# Altium PCB CCjammerRev0.PcbDoc
Units mil, origin at the board's own origin, x right, y up, seen from the top; angles counter-clockwise.
Board outline 3150 x 2000 mil, 2 copper layers (Top Layer, Bottom Layer); 11 components, 6 nets, 28 pads, 2 vias.
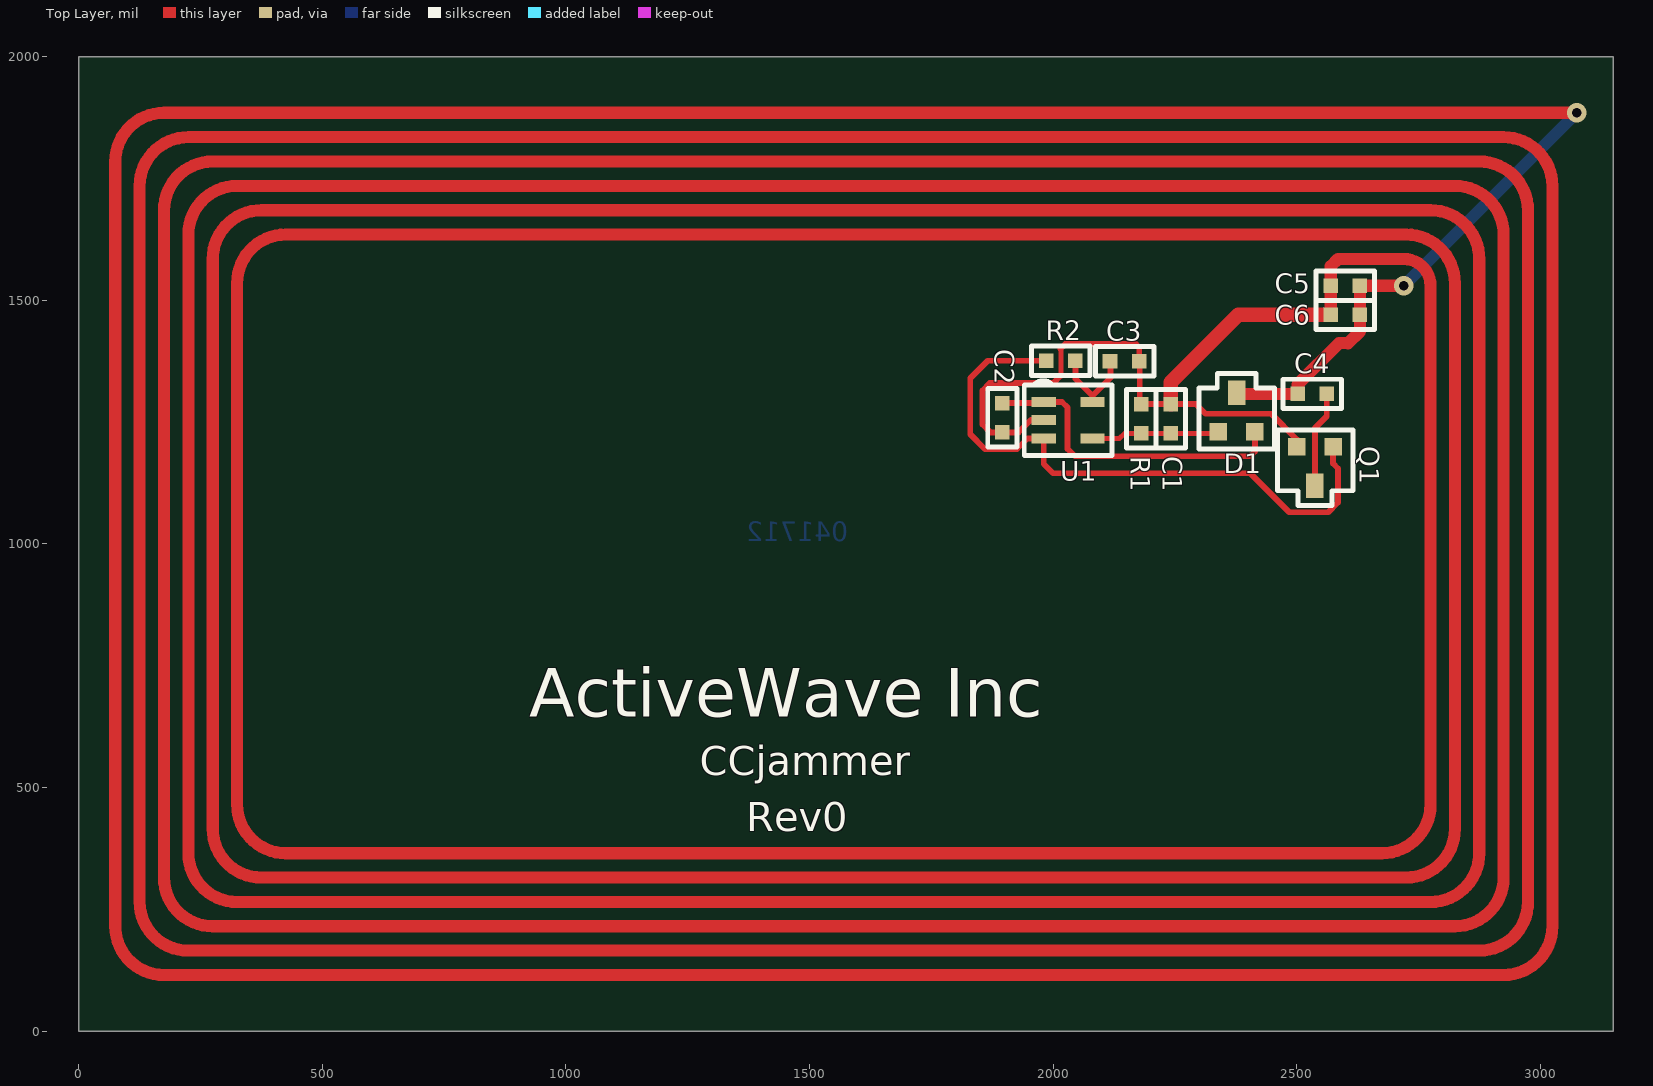
[diagram p0: Top Layer view]
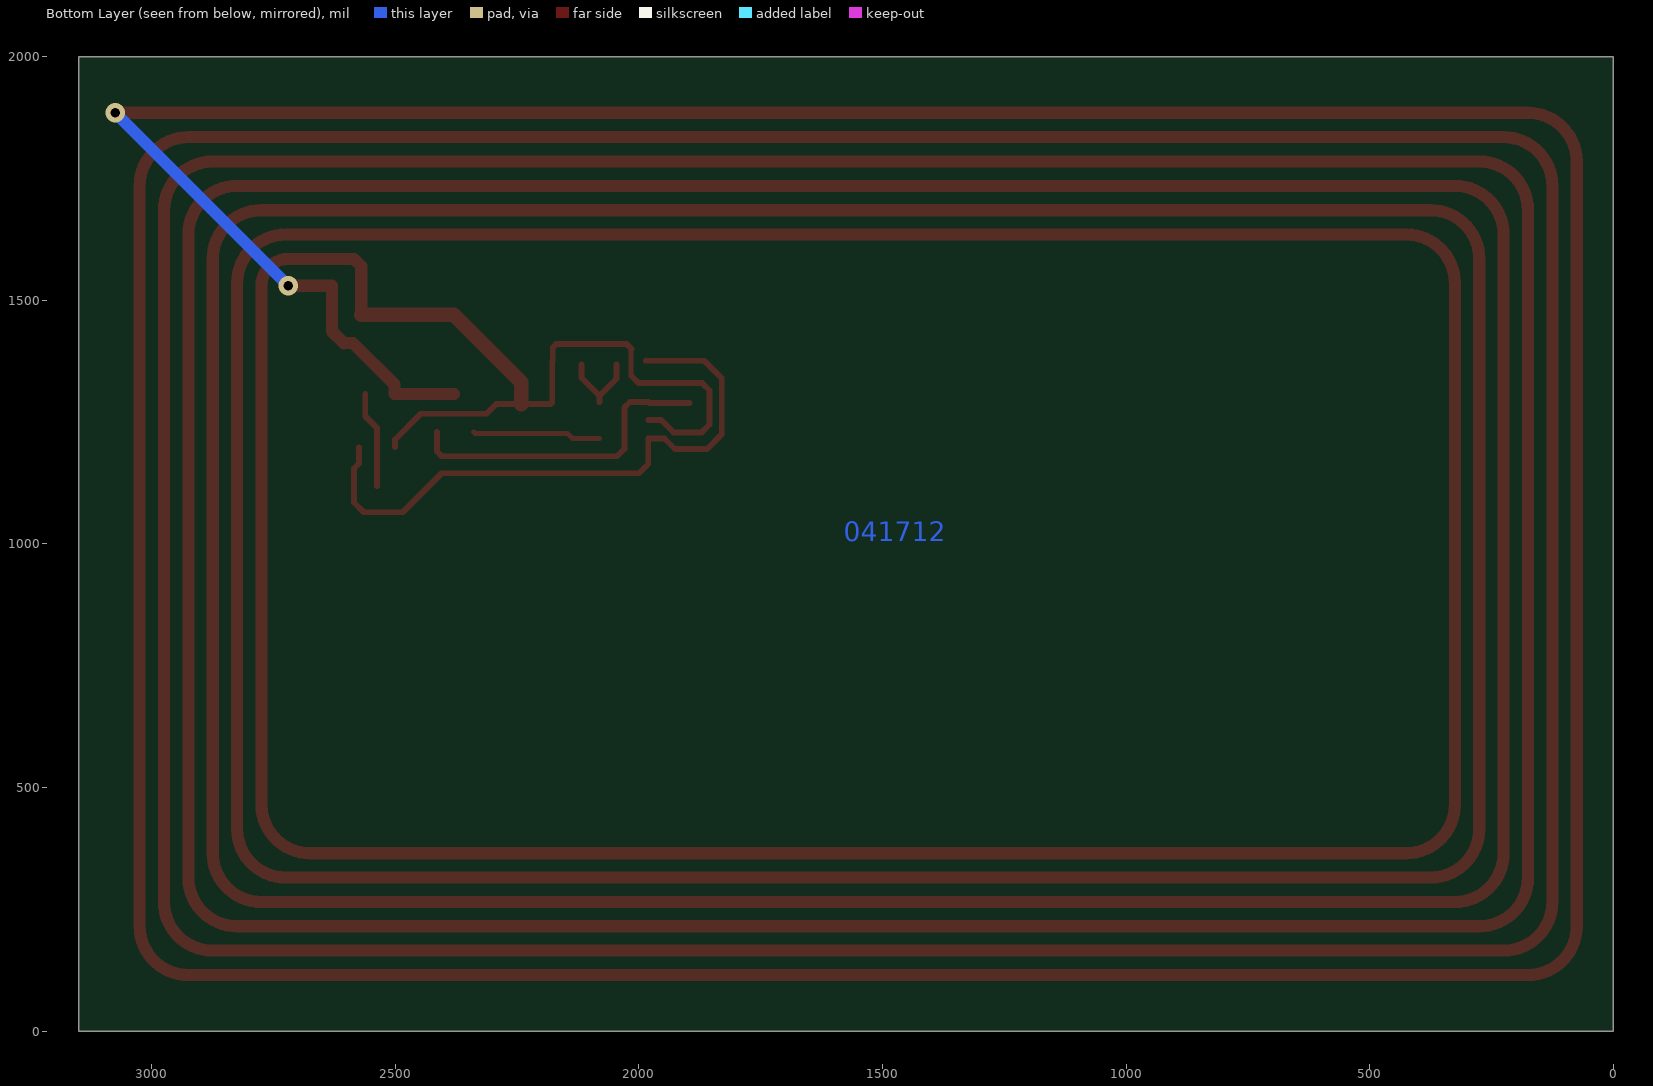
[diagram p1: Bottom Layer view, seen from below]

## Layer stack, top to bottom
Top Layer: signal copper 1.4
Dielectric: core 12.6, FR-4, Dk 4.8
Bottom Layer: signal copper 1.4

## Board outline
0,0 0,2000 3150,2000 3150,0

## Design rules (kind name [scope] priority, off if disabled: settings)
Clearance [All] p1: gap=10
PolygonConnect [All] p1: connectstyle=Relief reliefconductorwidth=10 reliefentries=4 polygonreliefangle="90 Angle"
RoutingVias [All] p1: holewidth=28 width=50 viastyle="Through Hole" minholewidth=28 minwidth=50 maxholewidth=28 maxwidth=50
SilkToSilkClearance [All] p1 off: silktosilkclearance=2
SilkscreenOverComponentPads [All] p1 off: minsilkscreentomaskgap=5
SolderMaskExpansion [All] p1: expansion=4
Width [All] p1: maxlimit=100 minlimit=6 preferedwidth=10
26 further rules are at their usual default settings.

## Components (designator, comment, footprint, x,y, rotation, side; value= is the part's Value field where it differs from the comment)
C1 "270pf" 0603_072205 2242,1257 r270 top
C2 "0.1uf" 0603_072205 1896,1259 r90 top
C3 "10uf" 0603_072205 2147,1375 r180 top
C4 "10pf" 0603_072205 2532,1308 r180 top
C5 "10pf" 0603_072205 2600,1530 r0 top
C6 "10pf" 0603_072205 2600,1470 r0 top
D1 "BAT721A" SOT23_012105 2377,1270 r0 top
Q1 "VN0605" "SOT23 FET_012005" 2538,1159 r180 top
R1 "500K" 0603_072205 2181,1257 r270 top
R2 "46K" 0603_072205 2016,1376 r180 top
U1 "MIC1555" SOT25_030205 2031,1254 r180 top

## Footprints (in the part's own frame and the unit in brackets; to place one, negate y for a bottom-side part, rotate by r counter-clockwise, add the part's x,y. Pads: shape width x height; smd on the part's side, far side on the other; paste and mask are expansions set on the pad)
0603_072205 [mil] "SM"
  rect 30x30 smd: 1(-30,0) 2(30,0)
  silkscreen extent -60,-30 60,30
"SOT23 FET_012005" [mil] "SMT"
  rect 36x50 smd: D(0.5,40)
  rect 36x36 smd: G(-37.5,-40) S(37.5,-40)
  silkscreen extent -78,-75 78,80
SOT23_012105 [mil] "SMT"
  rect 36x36 smd: 1(-37.5,-40) 2(37.5,-40)
  rect 36x50 smd: 3(0.5,40)
  silkscreen extent -78,-75 78,80
SOT25_030205 [mil] "SMT"
  rect 50x20 smd mask+3: 1(50,-37.5) 2(50,-0.5) 3(50,37.5) 4(-50,37.5) 5(-50,-37.5)
  round 30 on Mech1 paste+0 mask+3: 1(65,-75)
  silkscreen extent -90,-81 90,73

## Part data
C1 C2 C3 C4 C5 C6: library part Cap, "Capacitor"
D1: library part DIODE_DUAL_COM_AN_SOT23
Q1: library part "FET N CHANNEL"
R1 R2: library part RESISTOR

## Via types
v1: diameter 40, hole 20, Top Layer to Bottom Layer, tented both sides, 2 vias

## Nets (pads, with @x,y where several pads share a name; then routed paths per layer and width w, separated by ;. In a path a pad name is that pad's centre, name@x,y a point inside that pad or via, vN(x,y) a via of type N, cw(c..) or ccw(c..) an arc to the next point about the centre after c; other vN are vias at no path point)
ANTENNA: C1.1 C2.1 C3.1 C4.2 C5.1 C5.2 C6.1 C6.2 D1.3 Q1.S R1.1 U1.2 | length 52464.1
  Top Layer w10: 2015,1400 2016,1399 2016,1345.37 2015.31,1344.69
  Top Layer w12: U1.2 1954.5,1254.5 1929,1229 C2.1 1871,1229 1855,1245 1855,1315 1870,1330 2000.63,1330 2015.31,1344.69 ; 2015,1400 2025,1410 2170,1410 2177,1403 C3.1 ; C3.1@2178,1375 2178,1290 R1.1 C1.1 2293,1287 2312.94,1267.06 2447.94,1267.06 2500.5,1214.5 Q1.S
  Top Layer w25: D1.3@2379.5,1308 C4.2 2502,1309.82 2502,1327 2587.34,1412.34 2605.19,1412.34 ; C6.1 C5.1 2570,1570 2585,1585 2720,1585 cw(c2720,1530) 2775,1530 2775,465 cw(c2675,465) 2675,365 425,365 cw(c425,465) 325,465 325,1535 cw(c425,1535) 425,1635 615,1635 2550,1635 2725,1635 cw(c2725,1535) 2825,1535 2825,415 cw(c2725,415) 2725,315 375,315 cw(c375,415) 275,415 275,1585 cw(c375,1585) 375,1685 2775,1685 cw(c2775,1585) 2875,1585 2875,365 cw(c2775,365) 2775,265 325,265 cw(c325,365) 225,365 225,1635 cw(c325,1635) 325,1735 2825,1735 cw(c2825,1635) 2925,1635 2925,315 cw(c2825,315) 2825,215 275,215 cw(c275,315) 175,315 175,1685 cw(c275,1685) 275,1785 2875,1785 cw(c2875,1685) 2975,1685 2975,265 cw(c2875,265) 2875,165 225,165 cw(c225,265) 125,265 125,1735 cw(c225,1735) 225,1835 2925,1835 cw(c2925,1735) 3025,1735 3025,215 cw(c2925,215) 2925,115 175,115 cw(c175,215) 75,215 75,1785 cw(c175,1785) 175,1885 v1(3075,1885) ; 2605.77,1411.77 2630,1436 2630,1450 C6.2 C5.2 v1(2720,1530)
  Top Layer w30: C1.1 2242,1332 2380,1470 C6.1
  Bottom Layer w25: v1(2720,1530) v1(3075,1885)
GATEDRV: Q1.G R2.2 U1.3 | length 1281.7
  Top Layer w12: R2.2 1866,1376 1830,1340 1830,1225 1860,1195 1926.11,1195 1947.61,1216.5 U1.3 1981,1164 2000,1145 2405,1145 2485,1065 2565,1065 2585,1085 2585,1155 2575,1165 Q1.G@2575,1198.5
NetC4_1: C4.1 Q1.D | length 199.1
  Top Layer w12: Q1.D 2537.5,1237.5 2562,1262 C4.1
SIGNAL: C1.2 D1.1 R1.2 U1.4 | length 264.1
  Top Layer w10: U1.4 2136.5,1216.5 2147,1227 R1.2 C1.2 2336.5,1227 D1.1
THR: C3.2 R2.1 U1.5 | length 170.3
  Top Layer w12: R2.1@2046,1368 2046,1339 2081,1304 ; U1.5 2081,1304 ; C3.2@2118,1368 2118,1341 2081,1304
VCC: C2.2 D1.2 U1.1@1981,1291.5 | length 656.4
  Top Layer w12: C2.2 U1.1@1978.5,1289 ; U1.1@1981,1291.5 2018.5,1291.5 2030,1280 2030,1195 2045,1180 2405,1180 2414.5,1189.5 D1.2
pads on no net: U1.1@1966,1329

## Other copper
Top Layer:
  text ".Layer_Name" at 1723,-1549 h80
Bottom Layer:
  text "041712" at 1580,1005 h40
  text ".Layer_Name" at 2364,-1545 h80

## Silkscreen, mask and mechanical layers (free items; w line width, h text height)
Top Overlay:
  text "ActiveWave Inc" at 925,645 h100
  text "CCjammer" at 1275,525 h60
  text "Rev0" at 1370,410 h60
  text ".Layer_Name" at 1706,-1554 h80
Top Paste:
  text ".Layer_Name" at 1714,-1552 h80
Top Solder:
  text ".Layer_Name" at 1717,-1552 h80
Bottom Solder:
  text ".Layer_Name" at 1710,-1556 h80
Outline:
  the board outline again, w10
Title:
  lines w10: -559.99,-1567.94 -559.99,-467.94 cw(c-459.99,-467.94) -459.99,-367.94 3740.01,-367.94 cw(c3740.01,-467.94) 3840.01,-467.94 3840.01,-1567.94 cw(c3740.01,-1567.94) 3740.01,-1667.94 -459.99,-1667.94 ; -559.99,-1566.94 ccw(c-458.99,-1566.94) -460.75,-1667.93 ; -460.86,-1617.93 cw(c-459.99,-1567.94) -509.99,-1567.94 -509.99,-1467.94 cw(c-459.99,-1467.94) -459.99,-1417.94 1215.01,-1417.94 cw(c1215.01,-1467.94) 1265.01,-1467.94 1265.01,-1567.94 ; -460.86,-1367.93 cw(c-459.99,-1317.94) -509.99,-1317.94 -509.99,-1092.94 cw(c-459.99,-1092.94) -459.99,-1042.94 290.01,-1042.94 ; -459.99,-1617.94 1215.01,-1617.94 ; -459.99,-1367.94 290.01,-1367.94 ; 289.3,-1042.97 cw(c291.01,-1091.94) 340.01,-1091.94 ; 290.01,-992.94 -459.99,-992.94 cw(c-459.99,-942.94) -509.99,-942.94 -509.99,-717.94 cw(c-459.99,-717.94) -459.99,-667.94 290.01,-667.94 ; 291.01,-1367.94 ccw(c291.01,-1318.94) 340.01,-1318.94 ; 291.01,-667.94 cw(c291.01,-716.94) 340.01,-716.94 ; 292.01,-992.94 ccw(c292.01,-944.94) 340.01,-944.94 ; 340.01,-1317.94 340.01,-1092.94 ; 340.01,-942.94 340.01,-717.94 ; 390.01,-1318.94 ccw(c439.01,-1318.94) 439.01,-1367.94 ; 390.01,-1317.94 390.01,-1192.94 cw(c440.01,-1192.94) 440.01,-1142.94 2040.01,-1142.94 ; 390.01,-1043.94 ccw(c439.01,-1043.94) 439.01,-1092.94 ; 390.01,-1042.94 390.01,-717.94 cw(c440.01,-717.94) 440.01,-667.94 2490.01,-667.94 cw(c2490.01,-717.94) 2540.01,-717.94 2540.01,-1042.94 cw(c2490.01,-1042.94) 2490.89,-1092.94 ; 440.01,-1367.94 2040.01,-1367.94 ; 440.01,-1092.94 2490.01,-1092.94 ; 1216.18,-1617.94 ccw(c1217.01,-1569.94) 1265,-1568.27 ; 1364.14,-1617.93 cw(c1365.01,-1567.94) 1315.01,-1567.94 1315.01,-1467.94 cw(c1365.01,-1467.94) 1365.01,-1417.94 3040.01,-1417.94 cw(c3040.01,-1467.94) 3090.01,-1467.94 3090.01,-1567.94 ; 1365.01,-1617.94 3040.01,-1617.94 ; 2041.01,-1367.94 ccw(c2041.01,-1318.94) 2090.01,-1318.09 ; 2041.01,-1142.94 cw(c2041.01,-1191.94) 2090.01,-1191.94 ; 2090.01,-1317.94 2090.01,-1192.94 ; 2140.01,-1317.94 2140.01,-1192.94 ; 2140.01,-1316.94 ccw(c2191.01,-1316.94) 2190.12,-1367.93 ; 2140.08,-1193.45 cw(c2188.01,-1190.94) 2188.01,-1142.94 ; 2190.01,-1367.94 2490.01,-1367.94 ccw(c2490.01,-1317.94) 2540.01,-1317.94 2540.01,-1192.94 ; 2190.01,-1142.94 2490.01,-1142.94 ; 2491.01,-1142.94 cw(c2491.01,-1191.94) 2540.01,-1191.94 ; 2590.01,-1318.94 ccw(c2639.01,-1318.94) 2639.87,-1367.93 ; 2590.01,-1317.94 2590.01,-1192.94 cw(c2640.01,-1192.94) 2640.01,-1142.94 3740.01,-1142.94 ; 2640.01,-1367.94 3740.01,-1367.94 ccw(c3740.01,-1317.94) 3790.01,-1317.94 3790.01,-1191.94 ccw(c3741.01,-1191.94) 3741.01,-1142.94 ; 3041.18,-1617.94 ccw(c3042.01,-1569.94) 3090,-1568.27 ; 3140.01,-1568.94 ccw(c3189.01,-1568.94) 3189.87,-1617.93 ; 3140.01,-1567.94 3140.01,-1467.94 cw(c3190.01,-1467.94) 3190.01,-1417.94 3740.01,-1417.94 cw(c3740.01,-1467.94) 3790.02,-1467.07 ; 3190.01,-1617.94 3740.01,-1617.94 ccw(c3740.01,-1567.94) 3790.01,-1567.94 3790.01,-1467.94 ; 3739.3,-417.97 cw(c3741.01,-466.94) 3790.01,-466.94 ; 3740.01,-417.94 2640.01,-417.94 ccw(c2640.01,-467.94) 2590.01,-467.94 2590.01,-1042.94 ccw(c2640.01,-1042.94) 2640.01,-1092.94 3740.01,-1092.94 ccw(c3740.01,-1042.94) 3790.01,-1042.94 3790.01,-467.94 ; -509.99,-567.94 ccw(c-459.99,-567.94) -459.99,-617.94 2490.01,-617.94 ccw(c2490.01,-567.94) 2540.01,-567.94 2540.01,-467.94 ccw(c2490.01,-467.94) 2490.01,-417.94 -459.99,-417.94 ccw(c-459.99,-467.94) -509.99,-467.94 -509.99,-567.94
  text "Active Wave" at 570.01,-562.94 h96
  text "Active Wave" at 2681.09,-578.76 h100
  text "902 Clint Moore Rd." at 2631.09,-683.76 h64
  text "TITLE:" at 427.51,-755.44 h53.33
  text "ENGINEER:" at -459.99,-767.94 h53.33
  text "Suite 126" at 2926.09,-788.76 h64
  text "Boca Raton FL." at 2791.09,-883.76 h64
  text "CCjammer" at 1110,-925 h96
  text "PHONE:" at -459.99,-955.44 h53.33
  text "561-999-9422" at 2846.09,-1003.76 h64
  text "Drawn by:" at -459.99,-1147.94 h53.33
  text "JCMII" at -77.02,-1149 h53.33
  text "PART NO.:" at 440.01,-1230.44 h53.33
  text "REV:" at 2177.51,-1230.44 h53.33
  text "DATE:" at 2640.01,-1230.44 h53.33
  text "4/18/2012" at 3054.79,-1283.4 h53.33
  text "0" at 2352.51,-1305.44 h53.33
  text "PHONE:" at -459.99,-1330.44 h53.33
  text "FILE NAME:" at -459.99,-1507.94 h53.33
  text "LAYER:" at 1380.01,-1507.94 h53.33
  text "GERBER:" at 3200.01,-1507.94 h53.33
Notes:
  lines w25: 4008,-557 4518,-557
  text "NOTES" at 4001,-496 h100
  text "1) MATERIAL IS FR4" at 4008,-740 h100
  text "2) 0.010\" THICK 2 LAYER BOARD" at 3995,-959 h100
  text "3) WHITE SILKSCREEN TOP LAYER" at 4000,-1165 h100
  text "4) GREEN SOLDER MASK BOTH SIDES" at 3995,-1380 h100
Panel:
  text ".Layer_Name" at 1733,-1557 h80
Drill Drawing:
  text ".Layer_Name" at 1712,-1547 h80

## Dimensions
3149.61,0 to 3150,2000 on Dimensions
0,0 to 3150,0 on Dimensions